# Altium PCB mạch hoàn chỉnh.PcbDoc
Units mm, origin at the board's own origin, x right, y up, seen from the top; angles counter-clockwise.
Board outline 152.4 x 101.6 mm, 2 copper layers (Top Layer, Bottom Layer); 42 components, 32 nets, 169 pads, 0 vias.
Unrouted connection lines stored in the file: 1.
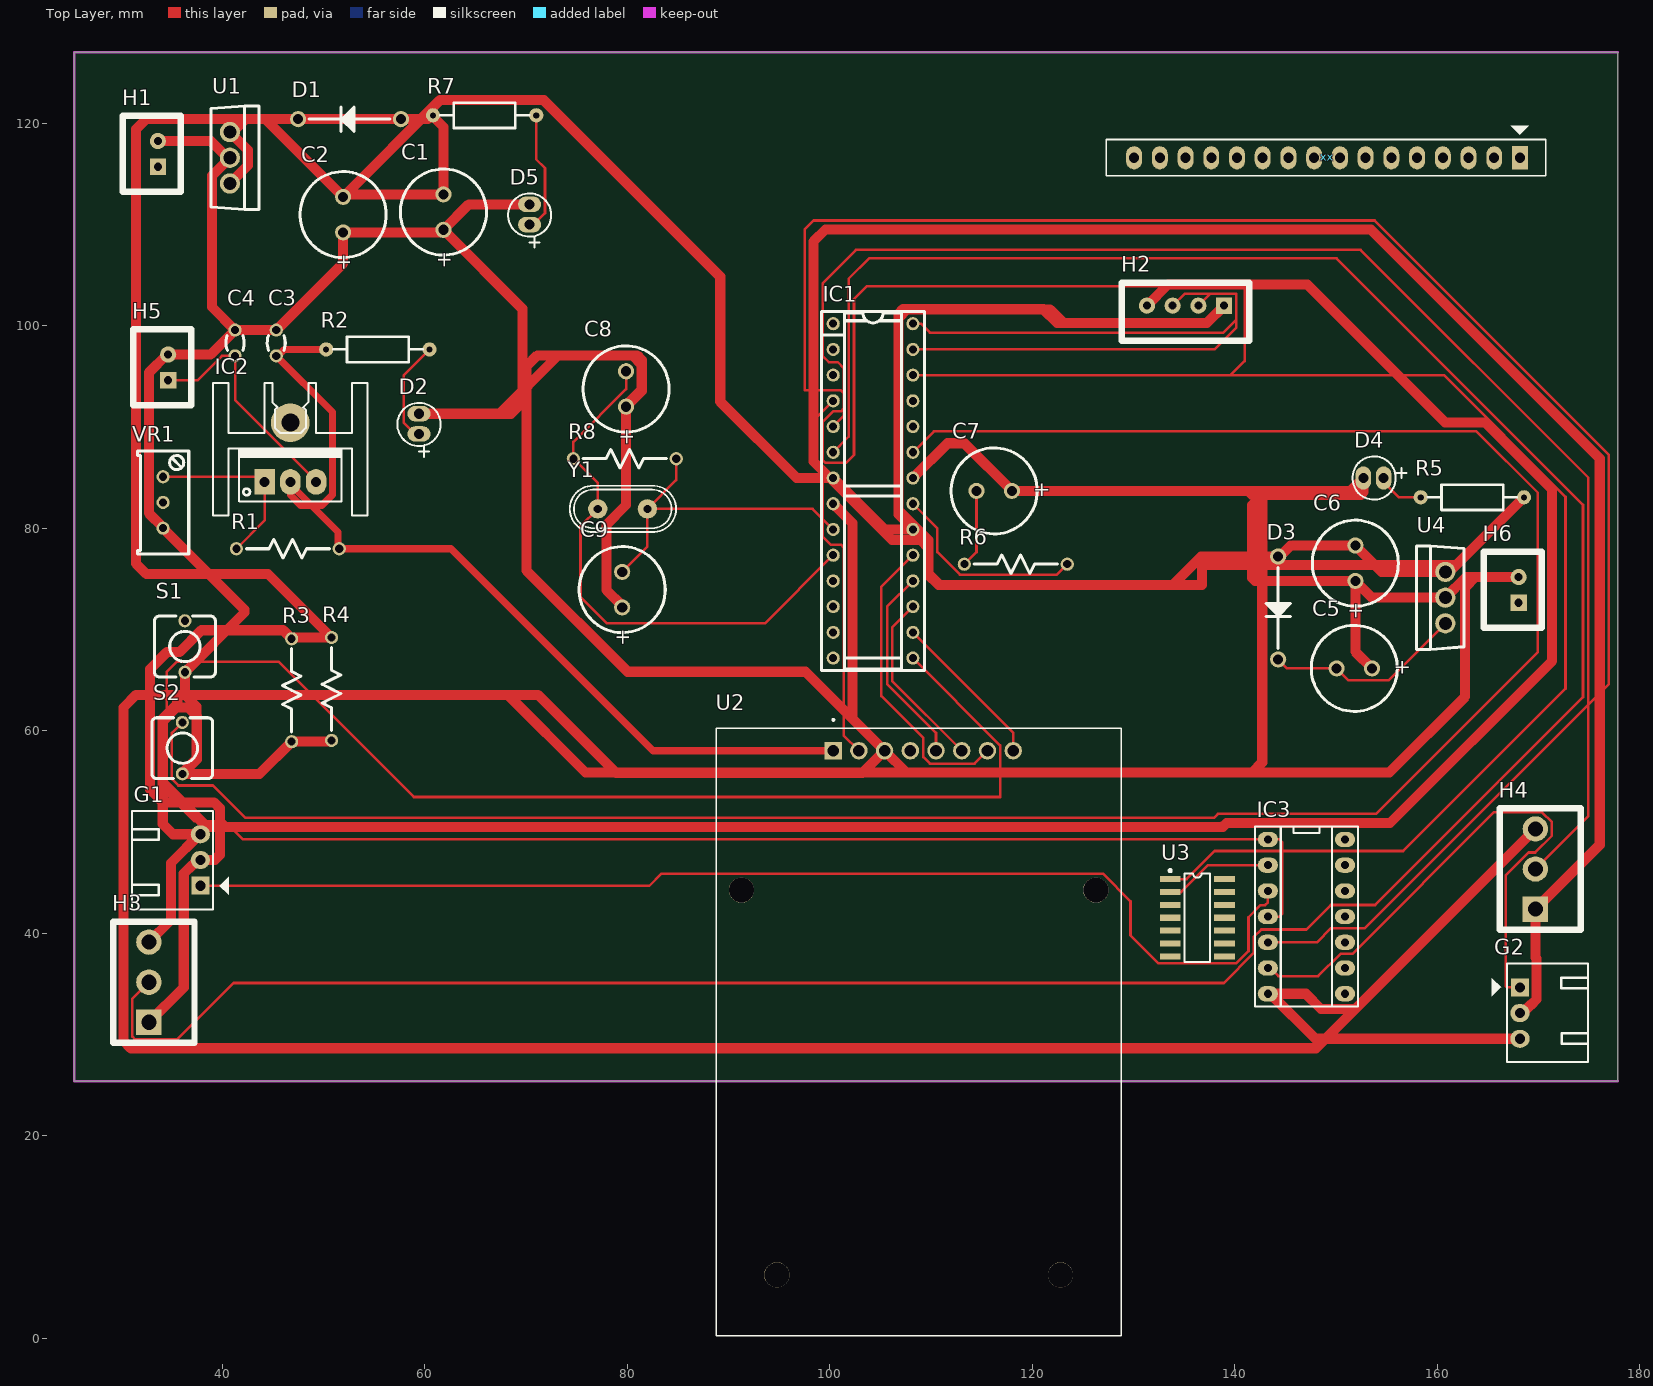
[diagram p0: Top Layer view]
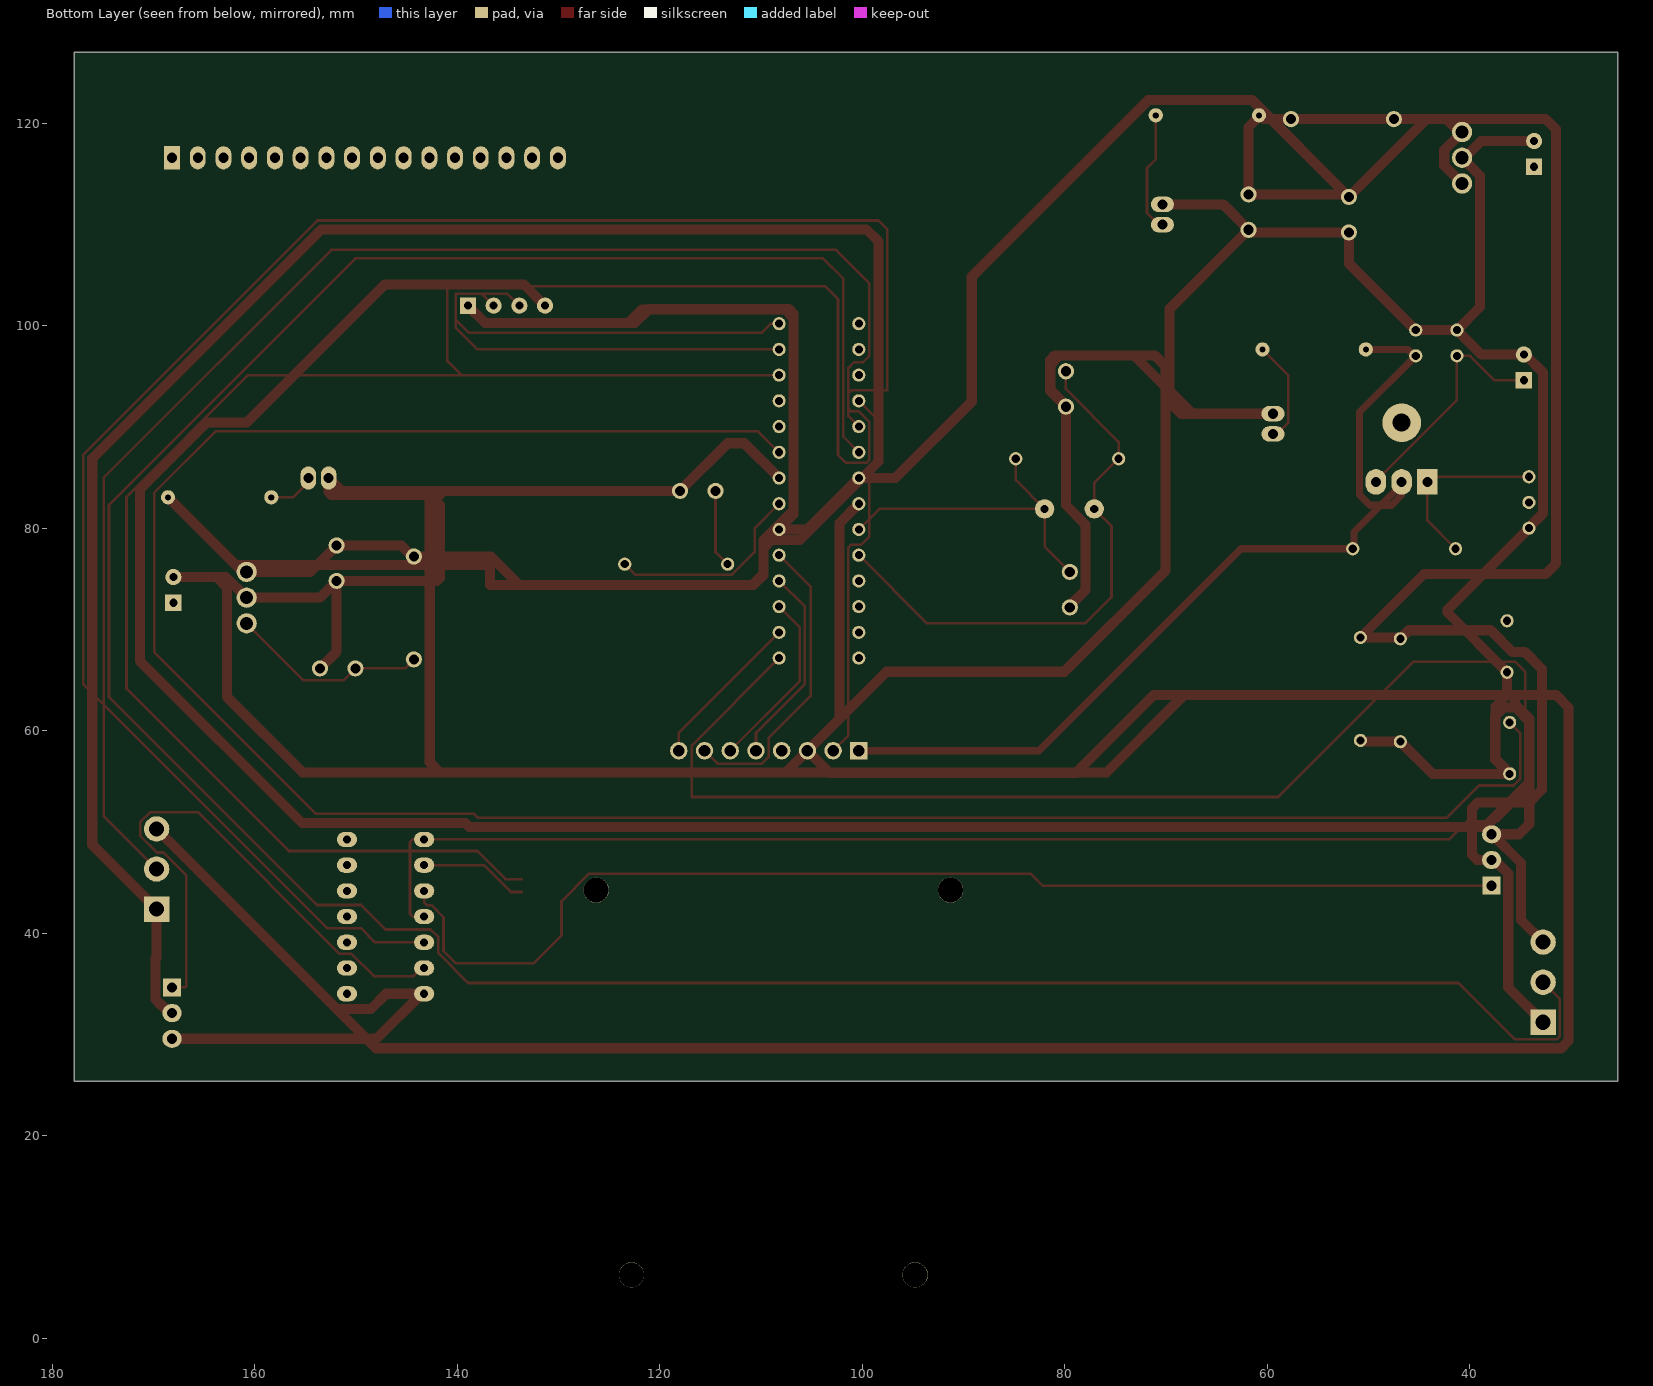
[diagram p1: Bottom Layer view, seen from below]
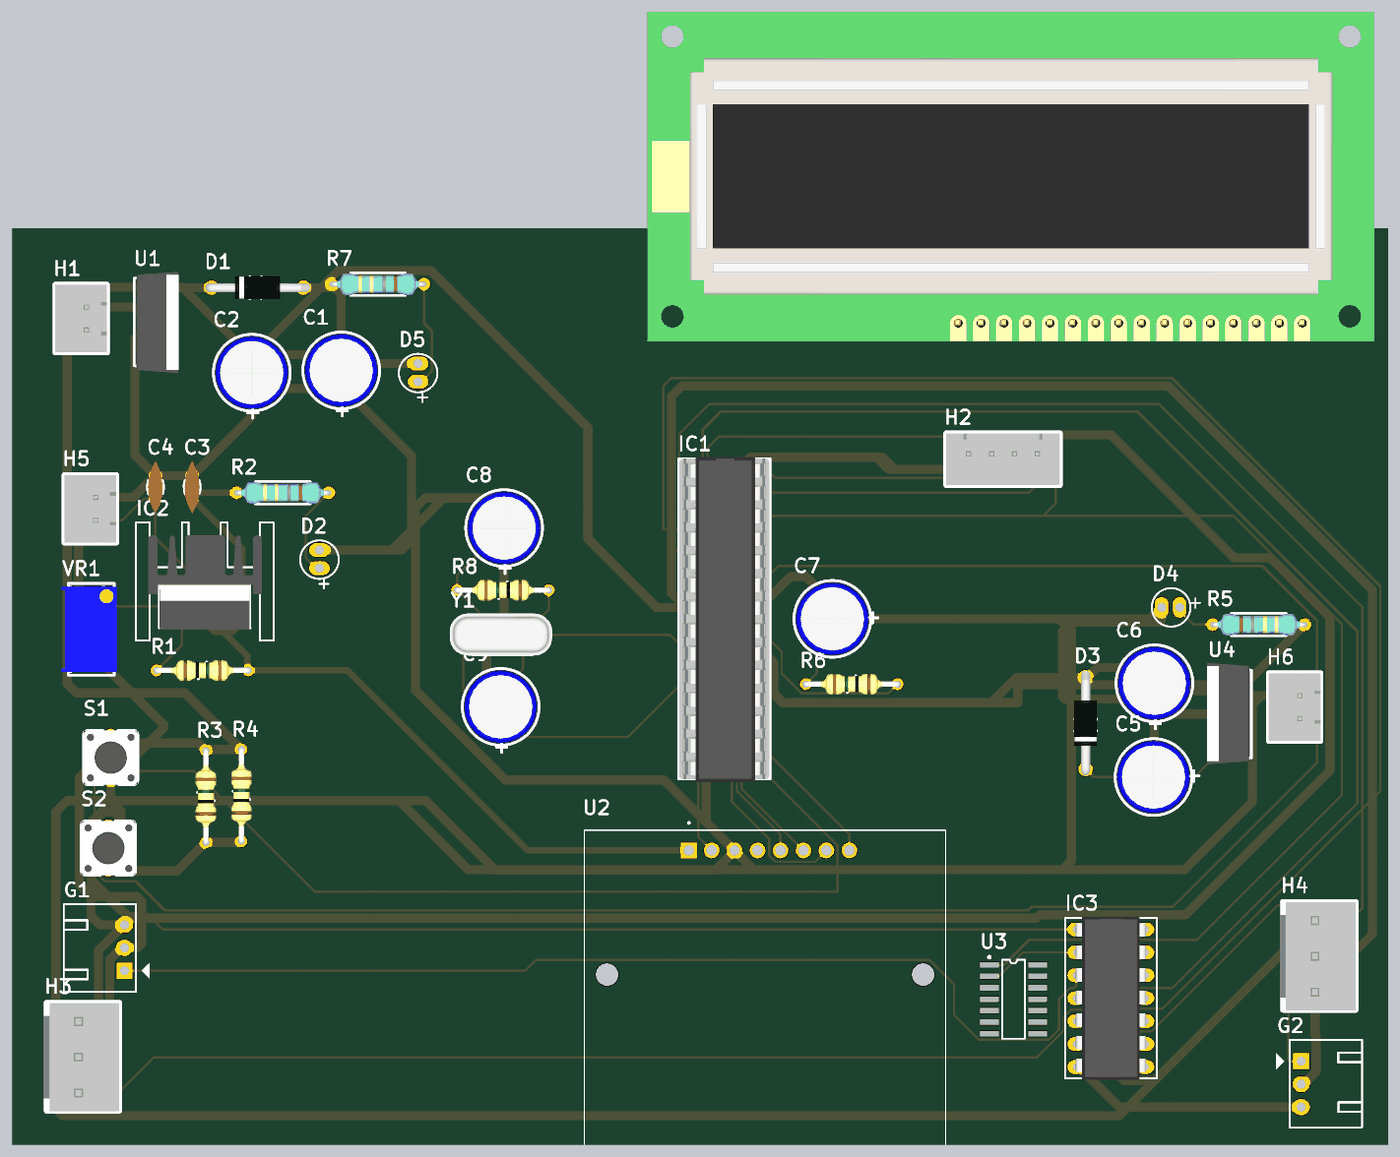
[diagram p2: 3D render of the assembled board from above, using the file's embedded part models]

## Layer stack, top to bottom
Top Solder: solder mask 0.0102, Solder Resist, Dk 3.5
Top Layer: signal copper 0.0356
Dielectric 1: dielectric 0.32, FR-4, Dk 4.8
Bottom Layer: signal copper 0.0356
Bottom Solder: solder mask 0.0102, Solder Resist, Dk 3.5

## Board outline
25.4,25.4 177.8,25.4 177.8,127 25.4,127

## Design rules (kind name [scope] priority, off if disabled: settings)
Clearance [All] p1: gap=0.254 ignorepadtopadclearanceinfootprint=FALSE
PolygonConnect [All] p1: connectstyle=Relief reliefconductorwidth=0.254 reliefentries=4 polygonreliefangle="90 Angle" airgapwidth=0.254
RoutingVias [All] p1: holewidth=0.711 width=1.27 viastyle="Through Hole" minholewidth=0.711 minwidth=1.27 maxholewidth=0.711 maxwidth=1.27
SolderMaskExpansion [All] p1: expansion=0.102 istentingtop=FALSE
Width GND [InNet('GND')] p1: maxlimit=1 minlimit=1 preferedwidth=1
Width 3v3 [InNet('+3v3')] p2: maxlimit=0.7 minlimit=0.7 preferedwidth=0.7
Width 5V [InNet('+5')] p3: maxlimit=1 minlimit=1 preferedwidth=1
Width [All] p4: maxlimit=0.254 minlimit=0.254 preferedwidth=0.254
30 further rules are at their usual default settings.

## Components (designator, comment, footprint, x,y, rotation, side; value= is the part's Value field where it differs from the comment)
C1 "100pF" CAP_100UF_50V 61.849,109.474 r90 top
C2 "100pF" CAP_100UF_50V 51.943,109.22 r90 top
C3 "0.1uF" "Tu gom 104" 45.339,98.298 r270 top
C4 "1uF" "Tu gom 104" 41.275,98.298 r270 top value=100pF
C5 "100pF" CAP_100UF_50V 153.543,66.167 r180 top
C6 "100pF" CAP_100UF_50V 151.892,74.803 r90 top
C7 "100nF" CAP_100UF_50V 117.983,83.693 r180 top value=100pF
C8 "22pF" CAP_100UF_50V 79.883,92.004 r90 top value=100pF
C9 "22pF" CAP_100UF_50V 79.502,72.192 r90 top value=100pF
D1 "Diode 1N4002" 1N4007 57.658,120.396 r180 top
D2 "LED" CAP10UF 59.436,91.313 r270 top
D3 "Diode 1N4002" 1N4007 144.272,77.216 r270 top
D4 "LED" CAP10UF 152.686,84.963 r0 top
D5 "LED" CAP10UF 70.358,111.982 r270 top
G1 "Servo SG90" "Header 3P DC 2.54" 37.846,44.704 r180 top
G2 "Servo SG90" "Header 3P DC 2.54" 168.148,34.671 r0 top
H1 "Header 2P" XH2.54M-2 33.655,115.697 r90 top
H2 "I2C" XH2.54M-4 138.938,101.981 r180 top
H3 "IR" VH3.96M-3 32.766,33.199 r90 top
H4 "IR" VH3.96M-3 169.672,44.375 r90 top
H5 "Header 2P" XH2.54M-2 34.671,94.615 r90 top
H6 "Header 2P" XH2.54M-2 168.021,72.644 r90 top
IC1 "ATMEGA328P" SOCKET_28 104.269,83.693 r270 top
IC2 "LM317" TO220H1 46.736,84.582 r0 top
IC3 "7408" DIP14 147.066,41.656 r270 top
R1 "2k4" CFR25S 41.402,77.978 r0 top value="R1/4W - 1K"
R2 "220R" "tro vach 1/4w" 55.372,97.663 r0 top
R3 "10k" CFR25S 46.863,58.928 r90 top value="R1/4W - 1K"
R4 "10k" CFR25S 50.8,59.055 r90 top value="R1/4W - 1K"
R5 "220R" "tro vach 1/4w" 163.449,83.058 r180 top
R6 "220" CFR25S 123.444,76.454 r180 top value="R1/4W - 1K"
R7 "220R" "tro vach 1/4w" 65.913,120.777 r0 top
R8 "1M" CFR25S 84.836,86.868 r180 top value="R1/4W - 1K"
S1 "EVQ11A04M" "BUTTON 2 PIN" 36.322,68.326 r90 top value=Button
S2 "EVQ11A04M" "BUTTON 2 PIN" 36.068,58.293 r90 top value=Button
U1 "LM7805" LM7805 40.767,116.586 r270 top
U2 "RC522" MODULE_CEG006900 108.78,30.275 r0 top
U3 "7404" DO14 136.525,41.656 r270 top
U4 "LM7805" LM7805 160.782,73.152 r90 top
VR1 "5K" VR1 34.163,85.09 r270 top value="VR 10K"
xx "LCD1602 XL" "LCD1602 with Jump" 168.148,116.586 r180 top
Y1 "16Mhz" "Thach Anh 2 chan cam" 79.539,81.915 r180 top value=4Mhz

## Footprints (in the part's own frame and the unit in brackets; to place one, negate y for a bottom-side part, rotate by r counter-clockwise, add the part's x,y. Pads: shape width x height; smd on the part's side, far side on the other; paste and mask are expansions set on the pad)
1N4007 [mm] "DIODE_DIP"
  round 1.6 hole 1 mask+0.1: 1(0,0) 2(10.16,0)
  silkscreen extent 1.08,-1.2 9.08,1.21, body extent -0.72,-1.25 10.88,1.25, height 2.75
"BUTTON 2 PIN" [mm]
  round 1.3 hole 0.8: 1(-2.54,0) 2(2.54,0)
  silkscreen extent -3,-3 3,3, body extent -4,-3 3.97,3, height 4.9
CAP10UF [mil]
  oval 60x90 hole 39.37 unplated: 1(78.74,0) 2(0,0)
  silkscreen extent -42,-84 167,84
CAP_100UF_50V [mm] "Capacitor, Electrolytic, Radial; Body 8 x 11.5 mm (Dia.xH typ); Pin Spacing 3.5 mm (typ)"
  round 1.6 hole 1: 1(0,0) 2(3.5,0)
  silkscreen extent -2.5,-4.25 6,4.25, body extent -2.28,-4.03 5.78,4.03, height 12.03
CFR25S [mm] "RESISTOR_1/4W"
  round 1.3 hole 0.8: 1(0,0) 2(10.16,0)
  silkscreen extent 0.98,-0.93 9.18,0.93, body extent -0.3,-1.16 10.47,1.16, height 2.93
DIP14 [mm] "W.300/L.900"
  oval 1.5x2 hole 0.8: 1(-7.62,-3.81) 2(-5.08,-3.81) 3(-2.54,-3.81) 4(0,-3.81) 5(2.54,-3.81) 6(5.08,-3.81) 7(7.62,-3.81) 8(7.62,3.81) 9(5.08,3.81) 10(2.54,3.81) 11(0,3.81) 12(-2.54,3.81) 13(-5.08,3.81) 14(-7.62,3.81)
  silkscreen extent -8.89,-5.08 8.89,5.08, body extent -9.05,-3.88 9.05,3.88, height 4.5
DO14 [mm]
  rect 0.6x2.05 smd: 1(-3.698,-2.913) 2(-2.428,-2.913) 3(-1.158,-2.913) 4(0.112,-2.913) 5(1.382,-2.913) 6(2.652,-2.913) 7(3.922,-2.913) 8(3.922,2.437) 9(2.652,2.437) 10(1.382,2.437) 11(0.112,2.437) 12(-1.158,2.437) 13(-2.428,2.437) 14(-3.698,2.437)
  silkscreen extent -4.67,-3.04 4.49,1.01
"Header 3P DC 2.54" [mil]
  rect 70x70 hole 39.37 unplated: 1(0,0)
  oval 75x70 hole 39.37 unplated: 2(0,-100) 3(0,-200)
  silkscreen extent -110,-290 265,93
"LCD1602 with Jump" [mil] "LCD dipslay 16x2, 16 pin"
  rect 62x90 hole 39: 1(0,0)
  oval 62x90 hole 39: 2(100,0) 3(200,0) 4(300,0) 5(400,0) 6(500,0) 7(600,0) 8(700,0) 9(800,0) 10(900,0) 11(1000,0) 12(1100,0) 13(1200,0) 14(1300,0) 15(1400,0) 16(1500,0)
  silkscreen extent -100,-125 1608,70, body extent -320,-1353 2850,84, height 764
LM7805 [mm] "POWER IC 7805"
  round 2 hole 1.3: 1(-2.54,0) 2(0,0) 3(2.54,0)
  silkscreen extent -5.1,-1.85 5.1,2.85, body extent -5.56,-1.63 5.65,3.06, height 19.17
MODULE_CEG006900 [mm]
  rect 1.725x1.725 / inner round 1.725 / far side rect 1.725x1.725 hole 1.15: 1(-8.45,27.76)
  round 1.725 hole 1.15: 2(-5.91,27.76) 3(-3.37,27.76) 4(-0.83,27.76) 5(1.71,27.76) 6(4.25,27.76) 7(6.79,27.76) 8(9.33,27.76)
  round 2.5 hole 2.5 unplated: ""(-17.5,14) ""(-14,-24) ""(14,-24) ""(17.5,14)
  silkscreen extent -20,-30 20,30.91
SOCKET_28 [mm] "DIP 28, w7.62, PIN TO PIN 2.54"
  round 1.3 hole 0.8: 1(-16.51,-3.935) 2(-13.97,-3.935) 3(-11.43,-3.935) 4(-8.89,-3.935) 5(-6.35,-3.935) 6(-3.81,-3.935) 7(-1.27,-3.935) 8(1.27,-3.935) 9(3.81,-3.935) 10(6.35,-3.935) 11(8.89,-3.935) 12(11.43,-3.935) 13(13.97,-3.935) 14(16.51,-3.935) 15(16.51,3.935) 16(13.97,3.935) 17(11.43,3.935) 18(8.89,3.935) 19(6.35,3.935) 20(3.81,3.935) 21(1.27,3.935) 22(-1.27,3.935) 23(-3.81,3.935) 24(-6.35,3.935) 25(-8.89,3.935) 26(-11.43,3.935) 27(-13.97,3.935) 28(-16.51,3.935)
  silkscreen extent -17.71,-5.08 17.71,5.08, body extent -17.91,-5 18.09,5, height 9.08
"Thach Anh 2 chan cam" [mm]
  round 1.905 hole 0.8: 1(-2.45,0) 2(2.45,0)
  silkscreen extent -5.28,-2.29 5.21,2.29, body extent -5.68,-2.36 5.68,2.29, height 3.5
TO220H1 [mil] "TO-220 - 1-2-3"
  round 150 hole 70: 0(0,230)
  rect 80x100 hole 39: 1(-100,0)
  oval 80x100 hole 39: 2(0,0) 3(100,0)
  silkscreen extent -300,-130 300,385, body extent -246,-82 250,329, height 1000
"tro vach 1/4w" [mm]
  round 1.4 hole 0.6: 1(-5.1,0) 2(5.1,0)
  silkscreen extent -4.39,-1.25 4.42,1.25, body extent -5.38,-1.2 5.38,1.2, height 2.41
"Tu gom 104" [mm] "Capacitor, Radial, Tantalum, Non-Polarised; Body 3.05 x 1.78 x 3.43 mm (WxTxH max); Pin Spacing 2.54 mm (typ)"
  round 1.3 hole 0.8: 1(-1.27,0) 2(1.27,0)
  silkscreen extent -0.73,-0.89 0.76,0.89, body extent -2.92,-0.85 2.92,0.85, height 6.42
VH3.96M-3 [mm]
  rect 2.5x2.5 hole 1.5: 1(-1.98,0)
  round 2.5 hole 1.5: 2(1.98,0) 3(5.94,0)
  silkscreen extent -4,-4.5 7.96,3.54, body extent -4.08,-4.49 7.92,3.88, height 10.26
VR1 [mm] "Variable Resistor"
  round 1.3 hole 0.8 mask+0.1: 1(0,0) 2(2.54,0) 3(5.08,0)
  silkscreen extent -2.54,-2.54 7.65,2.54, body extent -2.22,-3.3 7.3,2.79, height 11.56
XH2.54M-2 [mm]
  rect 1.6x1.6 hole 0.8: 1(0,0)
  round 1.6 hole 0.8: 2(2.54,0)
  silkscreen extent -2.48,-2.26 5.02,3.46, body extent -2.48,-2.26 5.02,3.48, height 6.91
XH2.54M-4 [mm]
  rect 1.6x1.6 hole 0.8: 1(0,0)
  round 1.6 hole 0.8: 2(2.54,0) 3(5.08,0) 4(7.62,0)
  silkscreen extent -2.48,-2.26 10.1,3.46, body extent -2.48,-2.26 10.1,3.48, height 6.91

## Part data
C1 C2 C4 C5 C6 C7 C8 C9: library part CN1, "Cap np  1pF - 472pF"
C3: library part CN2, "Cap np 104 => 105pF"
D1 D3: "1 Amp General Purpose Rectifier", Code_JEDEC=DO-204-AL, ComponentLink1Description="Manufacturer Link", ComponentLink1URL=http://www.fairchildsemi.com/, ComponentLink2Description=Datasheet, ComponentLink2URL=http://www.fairchildsemi.com/ds/1N%2F1N4001.pdf, DatasheetVersion=1998, LatestRevisionDate=17-Jul-2002, LatestRevisionNote="Re-released for DXP Platform.", PackageDescription="Diode, Axial; Body 5.2 x 2.7 mm (LxDia. max), Lead Dia. 0.86 mm (max)", PackageReference=DO-41, PackageVersion=Aug-1999, Published=8-Jun-2000, Publisher="Altium Limited"
G1 G2: "180o", Manufacturer="Servo SG90"
H1 H5 H6: library part "Header 2P 2.54 Duc Thang", "Cắm", Chung_Loai=Cắm, Don_Vi=Con, Ma_Hang=MH001283, Ten_Linh_Kien="Header 2P XH2.54-2P Đực Thẳng"
H2: library part "Header 4P 2.54 Duc Thang", "Cắm", Chung_Loai=Cắm, Don_Vi=Con, Ma_Hang=MH001285, Ten_Linh_Kien="Header 4P XH2.54-4P Đực Thẳng"
H3 H4: library part "Header 3P VH3.96 Duc Thang", "Cắm", Chung_Loai=Cắm, Don_Vi=Con, Ma_Hang=MH001292, Ten_Linh_Kien="Header 3P XH2.54-3P Đực Thẳng"
IC1: library part ATmega328P, "Flash 32K, Bytes EEPROM 1K Bytes, RAM 2K Bytes"
IC2: library part "LM317 TO220", "Cắm", Chung_Loai=Cắm, Don_Vi=Con, Ma_Hang=MH003115, Ten_Linh_Kien="LM317T TO220 REG LDO ADJ 1.5A"
IC3: "Quad 2-Input AND Gate"
R1 R3 R4 R6 R8: library part R, "Resistor 1/4W"
R2 R5 R7: library part "Tro Vach 1/4W 5% 220R", "Cắm", Chung_Loai=Cắm, Don_Vi=Con, Ma_Hang=MH007300, So_Chan=2, Ten_Linh_Kien="Trở Vạch 1/4w 5% 220R"
S1 S2: "Tact Switch 2 Pins White 6mm", ComponentLink1Description=Datasheet, ComponentLink1URL=D:\Dropbox\Datasheets\Electromechanical\Switchs\EVQ11.pdf, Unit Price=0.0060
U1 U4: "Linear Voltage Regulator 5V 1A 24V Max TO-220", ComponentLink1Description=Datasheet, ComponentLink1URL="D:\Dropbox\Datasheets\Power Management ICs\Linear Regulators\LM78XX.pdf", Unit Price=0.3000
U2: library part CEG006900, "RFID RC522 Reader IC Card Module Tags SPI Interface Read and Write", Package=None, Availability="Not in stock", Check_prices=https://www.snapeda.com/parts/CEG006900/YKS/view-part/?ref=eda, MF=YKS, MP=CEG006900, Price=None, SnapEDA_Link=https://www.snapeda.com/parts/CEG006900/YKS/view-part/?ref=snap
VR1: library part VR2, "Var Resistor"
xx: "LCD 1602 Xanh Lá", CHIP=HD44780, Ma_Hang=67HZ, NCC=NSHOP, Ten="Màn hình LCD 1602 Xanh Lá"
Y1: library part "Thach Anh 2 chan Cam", "Crystal For all Crystal 2pin."
U3: Text Field1=30, Text Field2=40

## Nets (pads, with @x,y where several pads share a name; then routed paths per layer and width w, separated by ;. In a path a pad name is that pad's centre, name@x,y a point inside that pad or via, vN(x,y) a via of type N, cw(c..) or ccw(c..) an arc to the next point about the centre after c; other vN are vias at no path point)
+3v3: C3.2 IC2.2 R1.2 R2.1 U2.1 | length 92.9
  Top Layer w0.7: IC2.2 IC2.2@46.736,84.328 ; R2.1 46.136,97.663 45.501,97.028 C3.2 50.902,91.465 50.902,83.312 49.86,82.271 47.752,82.271 46.736,83.287 IC2.2@46.736,84.328 ; U2.1 82.529,58.035 62.586,77.978 R1.2 51.447,78.093 51.447,79.617 IC2.2@46.736,84.328
+5: C1.2 C2.2 C6.2 D1.1 D1.2 D3.1 G1.2 G2.2 H2.1 H3.1 H4.1 IC1.7 IC1.20 R3.2 R4.2 R5.1 R7.1 U1.1 U1.3 U4.3 | length 688.5
  Top Layer w1: H3.1 36.203,34.656 36.203,45.905 36.686,46.388 36.716,46.388 37.572,47.244 G1.2 39.268,47.244 39.776,47.752 39.776,52.349 39.192,52.934 34.138,52.934 32.868,54.204 32.868,66.091 34.544,67.767 35.789,67.767 37.948,69.926 46.025,69.926 R3.2 46.944,69.088 47.071,69.215 R4.2 44.526,75.489 32.512,75.489 31.496,76.505 31.496,119.405 32.512,120.421 44.242,120.421 C2.2 ; U1.3 40.767,114.074 42.521,115.828 42.521,117.344 40.767,119.098 U1.1 41.038,119.126 42.308,120.396 D1.2 D1.1 60.324,120.396 60.705,120.777 R7.1 60.813,120.669 61.849,119.633 C1.2 52.359,112.974 52.105,112.72 C2.2 ; G2.2 168.422,32.131 169.278,32.987 169.308,32.987 169.791,33.47 169.791,37.498 169.672,37.617 H4.1 176.022,48.745 176.022,86.893 153.416,109.499 99.568,109.499 98.4,108.331 98.4,86.589 IC1.7@100.025,84.963 ; C2.2 61.499,122.276 71.755,122.276 89.179,104.851 89.179,92.507 96.723,84.963 IC1.7@100.025,84.963 ; IC1.7@100.025,84.963 106.147,78.842 108.966,78.842 109.728,78.08 ; IC1.7@100.025,84.963 IC1.7 105.414,79.883 IC1.20 108.204,79.964 106.8,81.368 106.8,100.785 107.622,101.607 121.753,101.607 123.093,100.267 137.224,100.267 H2.1 137.236,100.279 122.428,100.279 121.082,101.625 107.213,101.625 106.782,101.194 106.782,81.788 109.728,78.842 109.728,78.08 ; 109.728,75.514 109.728,78.08 ; 109.728,75.514 109.728,75.413 110.744,74.397 110.846,74.397 ; 109.728,75.514 110.846,74.397 ; 110.846,74.397 133.858,74.397 ; 133.858,74.397 136.754,74.397 136.754,76.378 160.782,76.378 161.869,76.378 R5.1 161.374,75.883 160.973,75.883 U4.3 154.503,75.692 C6.2 145.521,78.303 144.434,77.216 D3.1 136.677,77.216 133.858,74.397
CHOOSE-SERVO: IC1.26 IC3.5 U3.1 | length 386.6
  Top Layer w0.254: IC1.26 139.573,95.123 ; U3.1 135.23,45.354 138.009,48.133 156.616,48.133 172.644,64.16 172.644,83.109 160.63,95.123 139.573,95.123 ; IC3.5 148.107,39.116 149.504,40.513 152.832,40.513 176.911,64.592 176.911,87.274 153.797,110.388 98.4,110.388 97.511,109.499 97.511,93.624 101.092,93.624 101.365,93.351 101.365,91.815 101.092,91.542 100.33,91.542 99.289,90.5 99.289,86.741 99.568,86.462 101.6,86.462 102.387,87.249 102.387,102.641 103.632,103.886 140.97,103.886 140.97,96.52 139.573,95.123
GND: C1.1 C2.1 C3.1 C4.1 C5.1 C6.1 C7.1 C8.1 C9.1 D2.2 D4.2 D5.2 G1.3 G2.3 H1.2 H2.4 H3.3 H4.3 H5.2 H6.2 IC1.8 IC1.22 IC3.7 R3.1 R4.1 S1.1 S2.1 U1.2 U2.3 U4.2 VR1.3 | length 1140.5
  Top Layer w1: H3.3 34.949,41.322 34.949,46.95 G1.3@37.782,49.784 ; H1.2 38.882,118.237 40.533,116.586 U1.2 38.989,114.808 38.989,101.854 C4.1 ; G1.3 G1.3@37.782,49.784 ; R4.1 50.719,59.055 50.592,58.928 R3.1 43.688,55.753 S2.1 ; D2.2 67.42,91.313 ; D5.2 64.357,111.982 C1.1 ; C9.1 79.502,72.337 77.948,73.891 77.948,80.361 79.883,82.296 C8.1 ; IC1.8 102.246,80.511 102.246,61.199 ; IC1.22 111.633,88.392 113.284,88.392 C7.1 ; H2.4 133.401,104.064 147.142,104.064 160.757,90.449 164.719,90.449 171.323,83.845 171.323,66.904 155.321,50.902 139.192,50.902 138.811,50.521 38.481,50.521 34.138,54.864 ; IC3.7 IC3.7@143.506,34.036 ; D4.2 D4.2@152.686,84.724 ; C5.1 151.892,67.818 C6.1 ; G2.3 147.951,29.591 IC3.7@143.506,34.036 ; H4.3 151.889,32.532 ; 34.138,54.864 34.138,50.8 35.154,49.784 G1.3@37.782,49.784 ; 34.138,54.864 34.138,60.96 ; 34.138,60.96 34.138,61.189 35.56,62.611 35.56,63.551 ; 34.138,60.96 35.484,62.306 36.652,62.306 37.49,61.468 37.49,57.175 S2.1 ; 35.56,63.551 31.496,63.551 30.251,62.306 30.251,29.388 30.988,28.651 148.008,28.651 151.889,32.532 ; 35.56,63.551 36.324,63.551 68.199,63.551 ; S2.1 36.068,55.834 37.472,57.238 37.472,62.403 36.322,63.553 S1.1 42.215,71.679 42.215,71.958 VR1.3 34.163,80.091 32.759,81.495 32.759,95.369 34.545,97.155 H5.2 38.862,97.155 C4.1 ; C4.1 C3.1 51.943,106.172 C2.1 61.433,109.22 61.687,109.474 C1.1 ; C1.1 69.647,101.676 69.647,92.456 68.504,91.313 67.42,91.313 ; 67.42,91.313 73.165,97.058 80.527,97.058 81.437,96.148 81.437,93.703 79.883,92.149 C8.1 ; 68.199,63.551 71.196,63.551 78.867,55.88 ; 68.199,63.551 75.87,55.88 78.867,55.88 ; 78.867,55.88 103.255,55.88 ; 78.867,55.88 78.918,55.829 103.204,55.829 103.255,55.88 ; C8.1 81.458,93.579 81.458,96.596 80.975,97.079 71.12,97.079 70.053,96.012 70.053,75.819 80.035,65.837 97.608,65.837 102.246,61.199 ; 102.246,61.199 U2.3 ; 103.255,55.88 107.565,55.88 ; 103.255,55.88 U2.3 ; U2.3 107.565,55.88 ; 107.565,55.88 141.681,55.88 ; C7.1 151.416,83.693 152.205,84.482 152.444,84.482 D4.2@152.686,84.724 ; C7.1 141.3,83.693 141.681,83.312 142.697,83.312 ; 141.681,55.88 155.245,55.88 162.738,63.373 162.738,74.168 163.754,75.184 H6.2 162.814,75.184 U4.2 153.543,73.152 C6.1 ; 141.681,55.88 142.697,56.896 142.697,74.803 ; 142.697,74.803 C6.1 ; 142.697,74.803 141.986,74.803 141.681,75.108 141.681,82.296 142.697,83.312 ; 142.697,74.803 142.697,83.312 ; 142.697,83.312 152.432,83.312 152.686,83.566 D4.2@152.686,84.724 ; IC3.7@143.506,34.036 146.991,34.036 148.495,32.532 151.889,32.532
MISO-RC522: IC1.18 U2.5 | length 19.8
  Top Layer w0.254: IC1.18 105.664,72.263 105.664,64.627 110.49,59.801 U2.5
MOSI-RC522: IC1.17 U2.6 | length 17.9
  Top Layer w0.254: IC1.17 106.172,70.231 106.172,64.893 U2.6
NetC4_2: C4.2 H5.1 IC2.3 | length 23.4
  Top Layer w0.254: H5.1 37.568,94.615 39.981,97.028 C4.2 41.275,92.652 49.276,84.651 IC2.3
NetC5_2: C5.2 D3.2 U4.1 | length 19.7
  Top Layer w0.254: D3.2 145.161,66.167 C5.2 151.224,64.986 155.156,64.986 U4.1
NetC7_2: C7.2 R6.2 | length 7.7
  Top Layer w0.254: R6.2 114.483,77.653 C7.2
NetD2_1: D2.1 R2.2 | length 10.3
  Top Layer w0.254: D2.1 59.055,89.313 57.912,90.456 57.912,95.103 R2.2
NetD4_1: D4.1 R5.2 | length 4.7
  Top Layer w0.254: D4.1 154.686,84.582 156.21,83.058 R5.2
NetD5_1: D5.1 R7.2 | length 12
  Top Layer w0.254: D5.1 70.739,109.982 71.882,111.125 71.882,115.553 71.013,116.422 R7.2
NetF1_1: H6.1
NetF2_1: H1.1
NetG1_1: G1.1 IC3.3 | length 117.1
  Top Layer w0.254: G1.1 82.181,44.704 83.383,45.906 126.956,45.906 129.692,43.169 129.692,39.79 132.429,37.053 140.145,37.053 141.341,38.249 141.341,41.591 142.538,42.787 142.978,42.787 143.256,43.065 IC3.3
NetG2_1: G2.1 IC3.6 | length 55.4
  Top Layer w0.254: IC3.6 143.506,36.576 144.304,35.778 148.229,35.778 150.436,37.985 151.594,37.985 165.555,51.946 170.348,51.946 171.303,50.991 171.303,49.639 169.65,47.986 168.996,47.986 166.729,45.719 166.729,34.82 166.878,34.671 G2.1
NetIC1_21: IC1.21 R6.1 | length 19.9
  Top Layer w0.254: IC1.21 110.631,79.996 110.631,77.649 112.857,75.423 122.413,75.423 R6.1
NetIC2_1: IC2.1 R1.1 VR1.1 | length 18
  Top Layer w0.254: VR1.1 43.688,85.09 IC2.1 44.196,80.772 R1.1
NetIC3_2: IC3.2 U3.2 | length 10.7
  Top Layer w0.254: U3.2 134.686,44.084 137.338,46.736 IC3.2
OUT-IR1: H3.2 IC1.6 | length 284.5
  Top Layer w0.254: H3.2 31.135,33.548 31.135,29.801 31.392,29.544 35.564,29.544 41.123,35.103 138.913,35.103 141.859,38.048 141.859,39.624 142.621,40.386 147.066,40.386 149.479,42.799 153.853,42.799 174.375,63.321 174.375,82.311 150.03,106.656 103.881,106.656 101.873,104.648 101.873,89.042 IC1.6
OUT-IR2: H4.2 IC1.5 | length 143.1
  Top Layer w0.254: IC1.5 101.365,91.074 101.365,95.834 100.806,96.393 99.924,96.393 99.289,97.028 99.289,104.191 102.591,107.493 152.4,107.493 174.904,84.988 174.904,51.587 H4.2
PC0: IC1.23 S2.2 | length 230.1
  Top Layer w0.254: S2.2 35.035,59.8 35.035,55.236 35.671,54.6 39.098,54.6 42.289,51.41 137.925,51.41 138.31,51.795 153.915,51.795 169.908,67.788 169.908,83.508 163.847,89.568 110.269,89.568 IC1.23
PWM-SERVO: IC1.15 IC3.1 IC3.4 | length 238.3
  Top Layer w0.254: IC1.15 116.815,58.572 116.815,53.467 58.928,53.467 45.568,66.827 35.56,66.827 34.519,65.786 34.519,53.797 37.262,51.054 40.259,51.054 42.037,49.276 IC3.1 144.399,49.276 144.653,49.022 144.653,41.91 144.399,41.656 IC3.4
RESET: IC1.1 S1.2
RST-RC522: IC1.4 U2.2 | length 37.5
  Top Layer w0.254: IC1.4 98.781,91.03 98.781,85.954 99.289,85.446 99.289,79.172 100.076,78.384 101.092,78.384 101.365,78.111 101.365,59.54 U2.2
SCK-RC522: IC1.19 U2.7 | length 30.1
  Top Layer w0.254: IC1.19 105.102,74.241 105.102,63.426 109.245,59.282 109.245,57.404 109.88,56.769 114.304,56.769 U2.7
SCL-I2C: H2.3 IC1.28 | length 42.2
  Top Layer w0.254: IC1.28 108.991,100.203 109.88,99.314 138.862,99.314 140.132,100.584 140.132,103.175 135.052,103.175 H2.3
SDA-I2C: H2.2 IC1.27 | length 40.4
  Top Layer w0.254: IC1.27 137.998,97.663 140.132,99.797 140.132,103.175 137.592,103.175 H2.2
SS-RC522: IC1.16 U2.8 | length 15.8
  Top Layer w0.254: IC1.16 118.11,59.817 U2.8
VCC: IC3.14
XTAL1: C9.2 IC1.9 R8.1 Y1.1 | length 32.6
  Top Layer w0.254: C9.2 81.989,78.179 Y1.1 ; R8.1 84.836,84.762 Y1.1 ; IC1.9 98.302,81.915 Y1.1
XTAL2: C8.2 IC1.10 R8.2 Y1.2 | length 55
  Top Layer w0.254: C8.2 79.883,93.749 74.676,88.542 R8.2 77.089,84.455 Y1.2 75.387,80.213 75.387,73.203 77.978,70.612 93.603,70.612 IC1.10
pads on no net: IC1.2 IC1.3 IC1.11 IC1.12 IC1.13 IC1.14 IC1.24 IC1.25 IC2.0 IC3.8 IC3.9 IC3.10 IC3.11 IC3.12 IC3.13 U2. U2.4 U3.3 U3.4 U3.5 U3.6 U3.7 U3.8 U3.9 U3.10 U3.11 U3.12 U3.13 U3.14 VR1.2 xx.1 xx.2 xx.3 xx.4 xx.5 xx.6 xx.7 xx.8 xx.9 xx.10 xx.11 xx.12 xx.13 xx.14 xx.15 xx.16

## Keep-outs
Top Layer:
  lines w0.254: 177.8,25.4 25.4,25.4 25.4,127 177.8,127

## Text inside footprints (layer, text, board x,y; h text height)
C1: Top Overlay "+" at 62.549,105.624 h1.5 r90; Mechanical 1 "2" at 62.449,112.624 h1.2 r90; Mechanical 1 "1" at 62.449,109.224 h1.2 r90; Mechanical 1 "+" at 62.549,107.424 h1.5 r90
C2: Top Overlay "+" at 52.643,105.37 h1.5 r90; Mechanical 1 "2" at 52.543,112.37 h1.2 r90; Mechanical 1 "1" at 52.543,108.97 h1.2 r90; Mechanical 1 "+" at 52.643,107.17 h1.5 r90
C5: Top Overlay "+" at 157.393,66.867 h1.5 r180; Mechanical 1 "2" at 150.393,66.767 h1.2 r180; Mechanical 1 "1" at 153.793,66.767 h1.2 r180; Mechanical 1 "+" at 155.593,66.867 h1.5 r180
C6: Top Overlay "+" at 152.592,70.953 h1.5 r90; Mechanical 1 "2" at 152.492,77.953 h1.2 r90; Mechanical 1 "1" at 152.492,74.553 h1.2 r90; Mechanical 1 "+" at 152.592,72.753 h1.5 r90
C7: Top Overlay "+" at 121.833,84.393 h1.5 r180; Mechanical 1 "2" at 114.833,84.293 h1.2 r180; Mechanical 1 "1" at 118.233,84.293 h1.2 r180; Mechanical 1 "+" at 120.033,84.393 h1.5 r180
C8: Top Overlay "+" at 80.583,88.154 h1.5 r90; Mechanical 1 "2" at 80.483,95.154 h1.2 r90; Mechanical 1 "1" at 80.483,91.754 h1.2 r90; Mechanical 1 "+" at 80.583,89.954 h1.5 r90
C9: Top Overlay "+" at 80.202,68.342 h1.5 r90; Mechanical 1 "2" at 80.102,75.342 h1.2 r90; Mechanical 1 "1" at 80.102,71.942 h1.2 r90; Mechanical 1 "+" at 80.202,70.142 h1.5 r90
IC1: Mechanical 1 "28" at 105.969,100.693 h1.2 r270; Mechanical 1 "15" at 106.069,68.293 h1.2 r270; Mechanical 1 "14" at 101.269,68.093 h1.2 r270; Mechanical 1 "1" at 101.269,100.293 h1.2 r270
U1: Mechanical 2 "I" at 42.291,119.253 h1.2 r270; Mechanical 2 "O" at 42.291,114.427 h1.2 r270; Mechanical 2 "G" at 42.291,116.967 h1.2 r270; Mechanical 2 "1" at 40.367,119.253 h1 r270; Mechanical 2 "2" at 40.367,116.886 h1 r270; Mechanical 2 "3" at 40.267,114.386 h1 r270
U4: Mechanical 2 "I" at 159.258,70.485 h1.2 r90; Mechanical 2 "O" at 159.258,75.311 h1.2 r90; Mechanical 2 "G" at 159.258,72.771 h1.2 r90; Mechanical 2 "1" at 161.182,70.485 h1 r90; Mechanical 2 "2" at 161.182,72.852 h1 r90; Mechanical 2 "3" at 161.282,75.352 h1 r90
VR1: Mechanical 1 "1" at 33.673,85.23 h1 r270; Mechanical 1 "2" at 33.633,82.85 h1 r270; Mechanical 1 "3" at 33.653,80.32 h1 r270